# Altium PCB PCB_POTENTIOSTAT_P.PcbDoc
Units mil, origin at the board's own origin, x right, y up, seen from the top; angles counter-clockwise.
Board outline 7826.77 x 4724.41 mil, 2 copper layers (Top Layer, Bottom Layer), stack 61.024 mil thick; 2 components, 116 nets, 0 pads, 0 vias.
Unrouted connection lines stored in the file: 40.
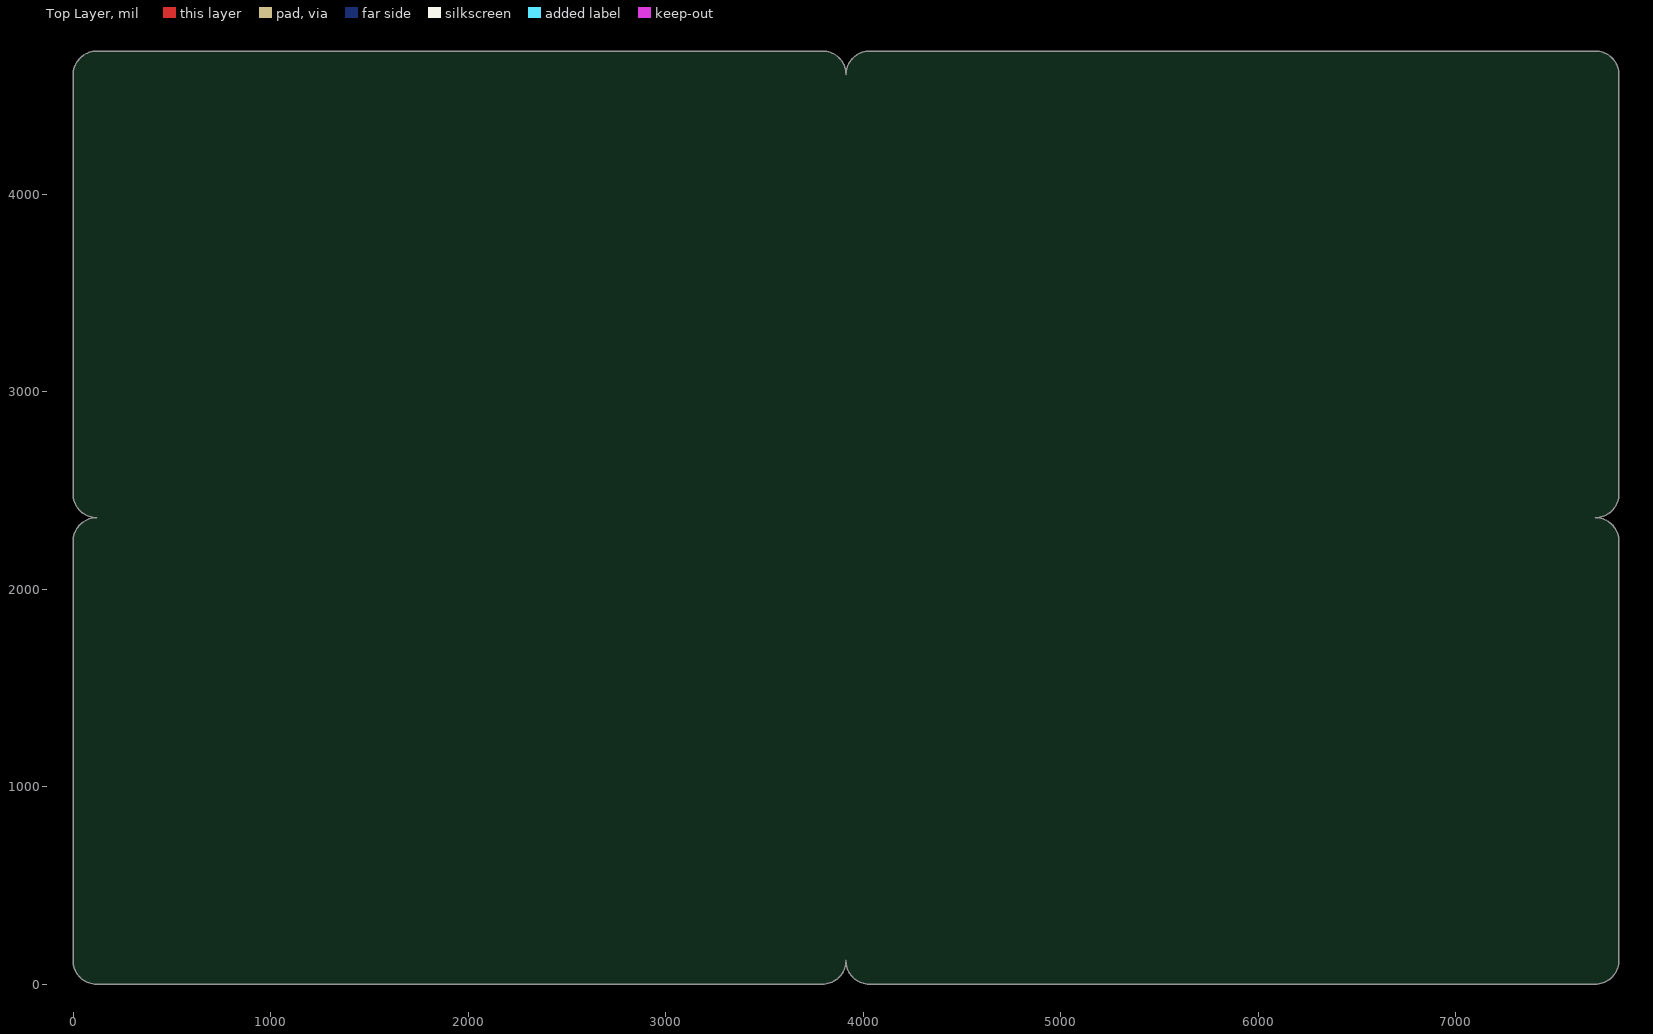
[diagram p0: Top Layer view]
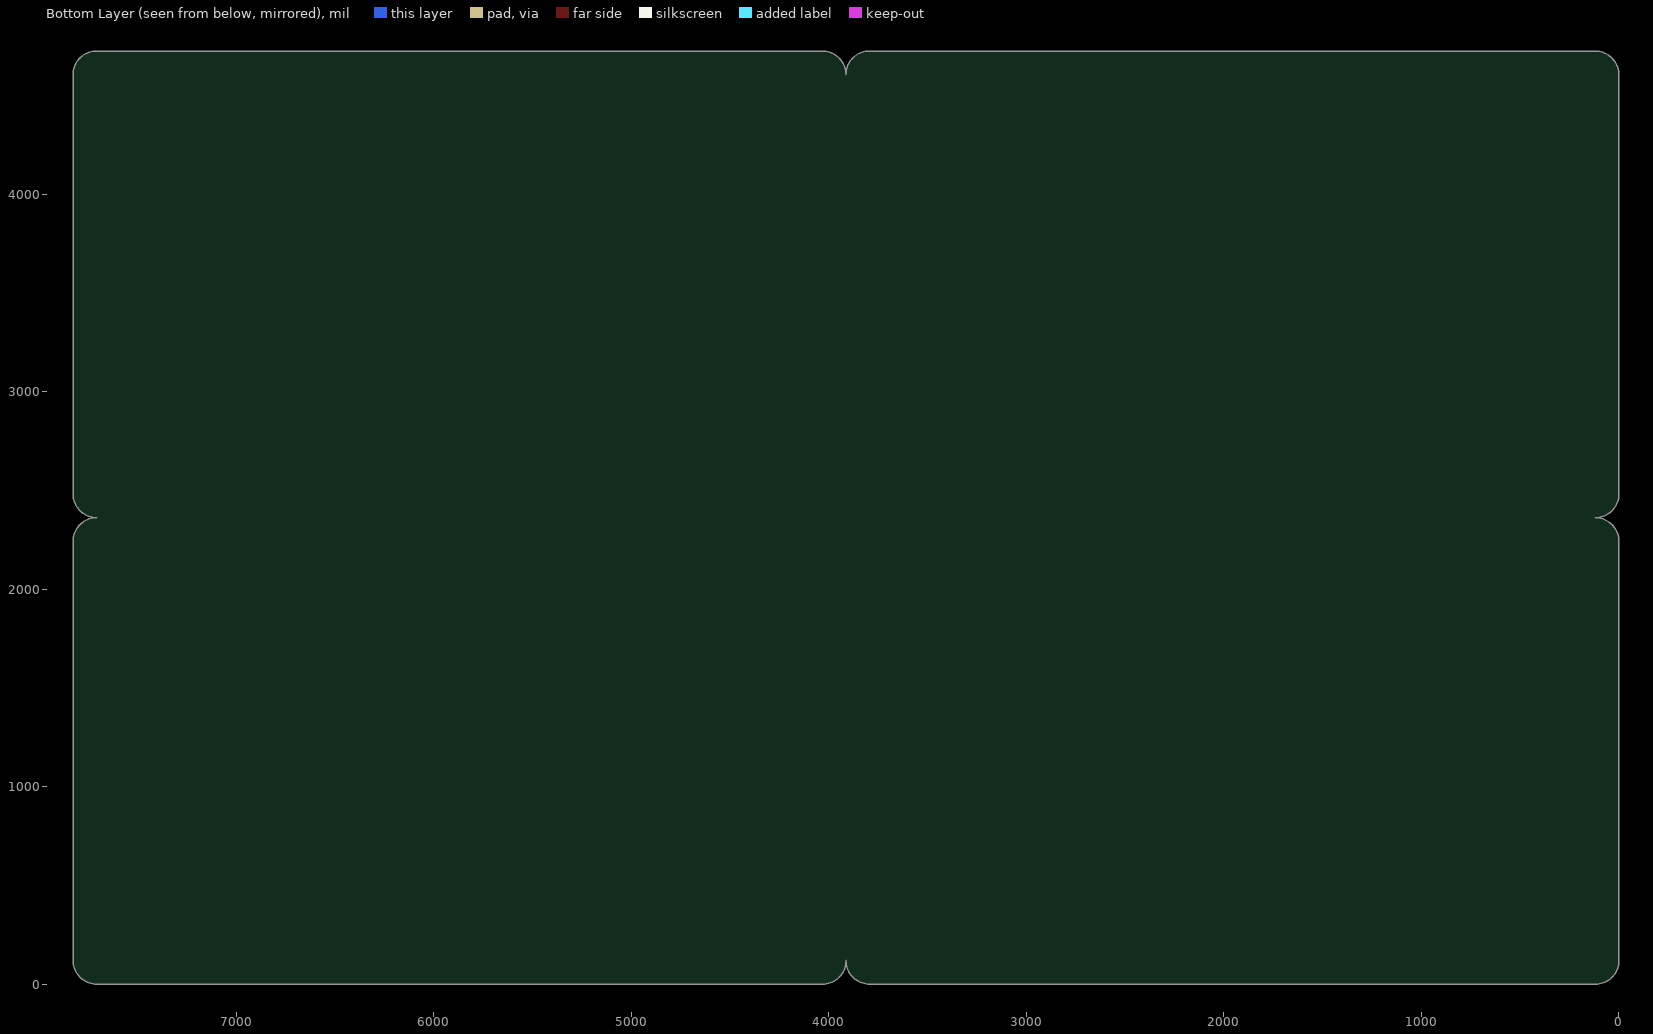
[diagram p1: Bottom Layer view, seen from below]

## Layer stack, top to bottom
Top Solder: solder mask 0.9843, SM-001, Dk 4
Top Layer: signal copper 1.378
Dielectric 3: core 58.2677, Core-039, Dk 4.2
Bottom Layer: signal copper 1.378
Bottom Solder: solder mask 0.9843, SM-001, Dk 4

## Board outline
0,118.11 ccw(c118.11,118.11) 118.11,0 3793.43,0 ccw(c3793.43,119.96) 3913.39,119.96 3913.39,118.11 ccw(c4031.49,118.11) 4031.49,0 7706.82,0 ccw(c7706.82,119.96) 7826.77,119.96 7826.77,2242.89 ccw(c7707.46,2242.89) 7707.46,2362.2 7707.14,2362.2 ccw(c7707.14,2481.84) 7826.77,2481.84 7826.77,4606.3 ccw(c7708.66,4606.3) 7708.66,4724.41 4033.34,4724.41 ccw(c4033.34,4604.45) 3913.39,4604.45 3913.39,4606.3 ccw(c3795.28,4606.3) 3795.28,4724.41 119.96,4724.41 ccw(c119.96,4604.45) 0,4604.45 0,2481.52 ccw(c119.31,2481.52) 119.31,2362.2 119.63,2362.2 ccw(c119.63,2242.57) 0,2242.57

## Design rules (kind name [scope] priority, off if disabled: settings)
Clearance Clearance_FID [HasFootprint('AUX_FIDUCIAL_STN')] p1: gap=35 ignorepadtopadclearanceinfootprint=FALSE except(0: Arc-Hole Track-Hole SMDPad-Hole THPad-Hole Via-Hole Fill-Hole Poly-Hole Region-Hole Text-Hole)
Clearance Clearance_PAR [InNet('USB*') vs InPoly] p2: gap=6 ignorepadtopadclearanceinfootprint=FALSE except(0: Arc-Hole Track-Hole SMDPad-Hole THPad-Hole Via-Hole Fill-Hole Poly-Hole Region-Hole Text-Hole)
Clearance [All] p3: gap=6 ignorepadtopadclearanceinfootprint=FALSE except(0: Arc-Hole Track-Hole SMDPad-Hole THPad-Hole Via-Hole Fill-Hole Poly-Hole Region-Hole Text-Hole; 5.7: Arc-SMDPad Track-SMDPad SMDPad-SMDPad; 8: Arc-Fill Arc-Poly Arc-Region Track-Fill Track-Poly Track-Region SMDPad-Fill SMDPad-Poly SMDPad-Region THPad-Fill THPad-Poly THPad-Region Via-Fill Via-Poly Via-Region; 12: Fill-Fill Fill-Poly Fill-Region Poly-Poly Poly-Region Region-Region)
DiffPairsRouting [All] p1: maxlimit=6 minlimit=6 mostfreqgap=6 toplayer_minwidth=12.3 toplayer_maxwidth=12.3 toplayer_prefwidth=12.3 bottomlayer_minwidth=12.3 bottomlayer_maxwidth=12.3 bottomlayer_prefwidth=12.3 impedanceprofiledriven=TRUE impedanceprofileid={0261A0E6-61D5-4121-8024-2EBF62659778} impedanceprofilevalue=90.000000 maxuncoupledlength=500
HoleSize [All] p1: absolutevalues=TRUE maxlimit=300 minlimit=10 maxpercent=80.000 minpercent=20.000
MinimumAnnularRing [All] p1: minimumring=10
MinimumSolderMaskSliver [All] p1: minsoldermaskwidth=3.5
PlaneClearance [All] p1: clearance=15
PlaneConnect [All] p1: pad.planeconnectstyle=Relief pad.reliefexpansion=20 pad.reliefentries=4 pad.reliefconductorwidth=10 pad.reliefairgap=10 via.planeconnectstyle=Direct via.reliefexpansion=20 via.reliefentries=4 via.reliefconductorwidth=10 via.reliefairgap=10
PolygonConnect [All] p1: thpad.connectstyle=Relief thpad.reliefconductorwidth=30 thpad.reliefentries=4 thpad.polygonreliefangle="90 Angle" thpad.airgapwidth=8 smdpad.connectstyle=Relief smdpad.reliefconductorwidth=16 smdpad.reliefentries=4 smdpad.polygonreliefangle="90 Angle" smdpad.airgapwidth=8 via.connectstyle=Direct via.reliefconductorwidth=10 via.reliefentries=4 via.polygonreliefangle="90 Angle" via.airgapwidth=10
RoutingVias [All] p1: holewidth=11.81 width=24 viastyle="Through Hole" minholewidth=11.81 minwidth=24 maxholewidth=11.81 maxwidth=24
SMDNeckDown [All] p1: percent=100.000
SilkToSilkClearance [All] p1: silktosilkclearance=0
SilkToSolderMaskClearance SilkscreenOverComponentPads [IsPad] p1: minsilkscreentomaskgap=1 clearancetoexposedcopper=TRUE
SolderMaskExpansion SolderMaskExpansion_FID [HasFootprint('AUX_FIDUCIAL_STN')] p1: expansion=30 istentingtop=FALSE
SolderMaskExpansion SolderMaskExpansion_VIA [IsVia] p2: expansion=-20 istentingtop=FALSE
SolderMaskExpansion SolderMaskExpansion_ALL [All] p3: expansion=2 istentingtop=FALSE
Width [All] p1: maxlimit=100 minlimit=6 preferedwidth=6
23 further rules are at their usual default settings.

## Classes and differential pairs
component class Pag1_PowerSupply: IC9
component class Pag3_Front_end_adc_dac: Y?
component class Pag2_Battery_Charger: BT1
differential pair USB_2: +USB_2_P -USB_2_N
differential pair USB_1: +USB_1_P -USB_1_N

## Components (designator, comment, footprint, x,y, rotation, side; value= is the part's Value field where it differs from the comment)
AUX10 "Comment" AUX_RULES1 8197,21 r0 top
AUX20 "Comment" AUX_FID_TEXT 2,5547 r0 top

## Footprints (in the part's own frame and the unit in brackets; to place one, negate y for a bottom-side part, rotate by r counter-clockwise, add the part's x,y. Pads: shape width x height; smd on the part's side, far side on the other; paste and mask are expansions set on the pad)
AUX_FID_TEXT [mil]
AUX_RULES1 [mil]

## Nets (pads, with @x,y where several pads share a name; then routed paths per layer and width w, separated by ;. In a path a pad name is that pad's centre, name@x,y a point inside that pad or via, vN(x,y) a via of type N, cw(c..) or ccw(c..) an arc to the next point about the centre after c; other vN are vias at no path point)
2V5_EN: 
+2_5V: 
+3V3: 
+5VCC: 
AGND: 
CG: 
EXT_GND_DETECT: 
I2C_SCL: 
I2C_SDA: 
LED_RX: 
LED_STATUS1: 
LED_STATUS2: 
LED_TX: 
NetC2_2: 
NetC5_1: 
NetC5_2: 
NetC9_1: 
NetC11_2: 
NetC12_1: 
NetC12_2: 
NetC14_2: 
NetC16_2: 
NetC17_1: 
NetC17_2: 
NetC27_2: 
NetC30_2: 
NetC31_2: 
NetC33_2: 
NetC34_2: 
NetC36_2: 
NetC38_1: 
NetC39_2: 
NetC40_2: 
NetC41_1: 
NetC44_2: 
NetC46_2: 
NetC47_2: 
NetC51_2: 
NetC52_2: 
NetC53_1: 
NetC55_2: 
NetC57_1: 
NetC57_2: 
NetC59_2: 
NetC61_2: 
NetC62_2: 
NetC65_2: 
NetC75_2: 
NetC76_2: 
NetCN1_2: 
NetCN2_4: 
NetCN3_1: 
NetCN3_2: 
NetCN3_3: 
NetCON5_2: 
NetCON5_4: 
NetCON5_6: 
NetCON5_8: 
NetCON5_10: 
NetD1_2: 
NetD2_A: 
NetIC1_4: 
NetIC3_2: 
NetIC3_5: 
NetIC3_6: 
NetIC3_7: 
NetIC3_8: 
NetIC4_17: 
NetIC4_18: 
NetIC4_19: 
NetIC4_21: 
NetIC4_23: 
NetIC4_30: 
NetIC4_31: 
NetIC4_32: 
NetIC5_1: 
NetIC5_2: 
NetIC5_3: 
NetIC5_4: 
NetIC5_8: 
NetIC5_12: 
NetIC5_13: 
NetIC8_11: 
NetIC8_24: 
NetIC8_26: 
NetIC8_34: 
NetIC8_35: 
NetLED1_1: 
NetLED1_2: 
NetLED2_1: 
NetLED2_2: 
NetLED3_2: 
NetLED4_2: 
NetLED5_2: 
NetLED6_2: 
NetR2_1: 
NetR16_2: 
NetR17_1: 
NetR24_2: 
NetR26_2: 
NetR27_2: 
NetR28_2: 
NetR32_2: 
NetR54_1: 
NetR60_1: 
NRST: 
REGN: 
TS1: 
USB_1_N: 
USB_1_P: 
USB_2_N: 
USB_2_P: 
V_Bat: 
V_BUS: 
V_EN: 
VBUS_USB1: 

## Other copper
Top Layer:
  text ".Layer_Name" at 644.43,-1000.38 h60
Bottom Layer:
  text ".Layer_Name" at 644.43,-1000.38 h60

## Silkscreen, mask and mechanical layers (free items; w line width, h text height)
Top Overlay:
  text ".Layer_Name" at 689.43,-1001.38 h60
Bottom Overlay:
  text ".Layer_Name" at 591.43,-995.38 h60
Top Paste:
  text ".Layer_Name" at 707.43,-998.38 h60
Bottom Paste:
  text ".Layer_Name" at 690.43,-1001.38 h60
Top Solder:
  text ".Layer_Name" at 689.43,-1001.38 h60
Bottom Solder:
  text "Bottom Solder" at 614.43,-999.38 h60
Fab Notes:
  lines w10: 14457,8116 14457,11316 17952,11316 17952,8116 14457,8116
  lines w15: 14448.66,1040.33 14923.55,1040.33 16004.92,1040.33 16701.42,1040.33 17456.23,1040.33 18117.73,1040.33 18662.61,1040.33 ; 14448.66,1180.33 14923.55,1180.33 16004.92,1180.33 16701.42,1180.33 17456.23,1180.33 18117.73,1180.33 18662.61,1180.33 ; 14448.66,1320.33 14923.55,1320.33 16004.92,1320.33 16701.42,1320.33 17456.23,1320.33 18117.73,1320.33 18662.61,1320.33 ; 14448.66,1460.33 14923.55,1460.33 16004.92,1460.33 16701.42,1460.33 17456.23,1460.33 18117.73,1460.33 18662.61,1460.33 ; 14448.66,1600.33 14923.55,1600.33 16004.92,1600.33 16701.42,1600.33 17456.23,1600.33 18117.73,1600.33 18662.61,1600.33 ; 14448.66,1740.33 14923.55,1740.33 16004.92,1740.33 16701.42,1740.33 17456.23,1740.33 18117.73,1740.33 18662.61,1740.33 ; 14448.66,1880.33 18662.61,1880.33 ; 14923.55,2020.33 14923.55,900.33 ; 16004.92,2020.33 16004.92,900.33 ; 16701.42,2020.33 16701.42,900.33 ; 17456.23,2020.33 17456.23,900.33 ; 18117.73,2020.33 18117.73,900.33 ; 14923.55,900.33 16004.92,900.33 ; 14923.55,900.33 14448.66,900.33 14448.66,2020.33 18662.61,2020.33 18662.61,900.33 18117.73,900.33 ; 16004.92,900.33 16701.42,900.33 ; 16701.42,900.33 17456.23,900.33 ; 17456.23,900.33 18117.73,900.33
  text "Manufacturing Especification" at 14999,11491 h200
  text "- BOARD SUBSTRATE MATERIAL: FR4-UL94V-0" at 14577,11116 h80
  text "- SURFACE FINISHING:" at 14577,10956 h80
  text "(x) GOLD IMMERSION (ENIG)" at 14577,10796 h80
  text "( ) HOT AIR LEVELING" at 14577,10636 h80
  text "( ) LEAD-FREE HOT AIR LEVELING" at 14577,10476 h80
  text "( ) EDGE CONNECTOR PLATING" at 14577,10316 h80
  text "- SOLDER MASK COLOR: GREEN" at 14577,9996 h80
  text "- TOP SILK-SCREEN COLOR: WHITE" at 14577,9836 h80
  text "- BOTTOM SILK-SCREEN COLOR: WHITE" at 14577,9676 h80
  text "- NO GERBER MODIFICATIONS ARE ALLOWED" at 14577,9356 h80
  text "WITHOUT PREVIOUS AUTHORIZATION." at 14577,9196 h80
  text "- TEAR-DROPS CAN BE ADDED TO IMPROVE" at 14577,9036 h80
  text "MANUFACTURABILTY." at 14577,8876 h80
  text "- SEE LAYER STACK-UP TABLE FOR MORE" at 14577,8716 h80
  text "DETAILED STACKING INFORMATION." at 14577,8556 h80
  text "- USE IPC-CLASS 2 AS STANDARD FOR" at 14577,8396 h80
  text "MANUFACTURING." at 14577,8236 h80
  text "Layer Stack Up Detail" at 15865,2085 h200
  text "Layer" at 14528.66,1915.33 h70
  text "Name" at 15003.55,1915.33 h70
  text "Material" at 16084.92,1915.33 h70
  text "Thickness" at 16781.42,1915.33 h70
  text "Constant" at 17536.23,1915.33 h70
  text "Gerber" at 18197.73,1915.33 h70
  text "Top Overlay" at 15003.55,1775.33 h70
  text "GTO" at 18197.73,1775.33 h70
  text "Top Solder" at 15003.55,1635.33 h70
  text "SM-001" at 16084.92,1635.33 h70
  text "0,025mm" at 16781.42,1635.33 h70
  text "4" at 17536.23,1635.33 h70
  text "GTS" at 18197.73,1635.33 h70
  text "1" at 14528.66,1495.33 h70
  text "Top Layer" at 15003.55,1495.33 h70
  text "Copper" at 16084.92,1495.33 h70
  text "0,035mm" at 16781.42,1495.33 h70
  text "GTL" at 18197.73,1495.33 h70
  text "Dielectric 3" at 15003.55,1355.33 h70
  text "Core-039" at 16084.92,1355.33 h70
  text "1,480mm" at 16781.42,1355.33 h70
  text "4,2" at 17536.23,1355.33 h70
  text "2" at 14528.66,1215.33 h70
  text "Bottom Layer" at 15003.55,1215.33 h70
  text "Copper" at 16084.92,1215.33 h70
  text "0,035mm" at 16781.42,1215.33 h70
  text "GBL" at 18197.73,1215.33 h70
  text "Bottom Solder" at 15003.55,1075.33 h70
  text "SM-001" at 16084.92,1075.33 h70
  text "0,025mm" at 16781.42,1075.33 h70
  text "4" at 17536.23,1075.33 h70
  text "GBS" at 18197.73,1075.33 h70
  text "Bottom Overlay" at 15003.55,935.33 h70
  text "GBO" at 18197.73,935.33 h70
  text "Total board thickness:" at 14528.66,795.33 h70
  text "1,600mm" at 16781.42,795.33 h70
  text "1) All differential pairs at their respective layers, with trace width specified (12.3/6/12.3 mil), must be adjusted" at 14404.49,449.42 h80
  text "in order to obtain Zdiff = 90 +/- 10%. For TOP and BOTTOM pairs a Differential Edge-Coupled Microstrip" at 14404.49,249.42 h80
  text "configuration is used, for internal layer pairs a Differential Edge-Coupled Stripline configuration is used." at 14404.49,49.42 h80
  text "Manufacturing Especification" at 158.49,-991.58 h60
V Cut:
  lines w20: 1.21,2362.2 119.31,2362.2 ; 119.63,2362.2 7707.14,2362.2 7825.25,2362.2 ; 3913.39,1.85 3913.39,119.96 ; 3913.39,118.11 3913.39,4606.3 3913.39,4724.41
  text "VCUT" at 3800,4765 h60
  text "VCUT" at 7847,2329 h60
Route Tool Path:
  lines w20: 3793.75,2362.2 ccw(c3793.75,2481.84) 3913.39,2481.84 ; 3794.07,2362.2 cw(c3794.07,2242.89) 3913.39,2242.89 ; 3913.39,2242.57 cw(c4033.02,2242.57) 4033.02,2362.2 ; 3913.39,2481.52 ccw(c4032.7,2481.52) 4032.7,2362.2
  text "CUTOUT" at 3868,2355 h16
  text ".Layer_Name" at 643.43,-1000.38 h60
AUXILIAR:
  lines w15: 0,0 0,118.11 ; 7826.77,4606.3 7826.77,4724.41
Drill Drawing:
  circle w10: c109.25,6949.35 r20
  circle w10: c109.25,6949.35 r33.33
  circle w10: c109.25,5899.35 r33.33
  lines w10: 75.92,5749.35 109.25,5716.01 142.58,5749.35 109.25,5782.68 75.92,5749.35 ; 75.92,6032.68 92.58,6032.68 109.25,6016.01 125.92,6032.68 142.58,6032.68 125.92,6049.35 142.58,6066.01 125.92,6066.01 109.25,6082.68 92.58,6066.01 75.92,6066.01 92.58,6049.35 75.92,6032.68 ; 75.92,6182.68 92.58,6182.68 92.58,6166.01 125.92,6166.01 125.92,6182.68 142.58,6182.68 142.58,6216.01 125.92,6216.01 125.92,6232.68 92.58,6232.68 92.58,6216.01 75.92,6216.01 75.92,6182.68 ; 75.92,6316.01 142.58,6316.01 142.58,6382.68 75.92,6382.68 75.92,6316.01 ; 75.92,6466.01 75.92,6482.68 92.58,6499.35 75.92,6516.01 75.92,6532.68 92.58,6532.68 109.25,6516.01 125.92,6532.68 142.58,6532.68 142.58,6516.01 125.92,6499.35 142.58,6482.68 142.58,6466.01 125.92,6466.01 109.25,6482.68 92.58,6466.01 75.92,6466.01 ; 75.92,6682.68 142.58,6682.68 109.25,6616.01 75.92,6682.68 ; 75.92,6766.01 109.25,6782.68 142.58,6766.01 125.92,6799.35 142.58,6832.68 109.25,6816.01 75.92,6832.68 92.58,6799.35 75.92,6766.01 ; 75.92,7066.01 142.58,7066.01 142.58,7132.68 75.92,7132.68 75.92,7066.01 ; 89.25,7079.35 129.25,7079.35 129.25,7119.35 89.25,7119.35 89.25,7079.35
  lines w15: 16.12,5671.01 7490.04,5671.01 ; 16.12,7171.01 7490.04,7171.01 ; 567,5521.01 567,7321.01 ; 1216.83,5521.01 1216.83,7321.01 ; 2266.52,5521.01 2266.52,7321.01 ; 3624.12,5521.01 3624.12,7321.01 ; 4130,5521.01 4130,7321.01 ; 4863.8,5521.01 4863.8,7321.01 ; 6363.35,5521.01 6363.35,7321.01 ; 16.12,5521.01 7490.04,5521.01 7490.04,7321.01 16.12,7321.01 16.12,5521.01
  text "Symbol" at 106.12,7216.01 h72
  text "Count" at 612,7216.01 h72
  text "Hole Size" at 1261.83,7216.01 h72
  text "Routed Path Length" at 2311.52,7216.01 h72
  text "Plated" at 3669.12,7216.01 h72
  text "Hole Type" at 4175,7216.01 h72
  text "Drill Layer Pair" at 4908.8,7216.01 h72
  text "Hole Tolerance" at 6408.35,7216.01 h72
  text "2020" at 612,7066.01 h60
  text "0,3mm (11,81mil)" at 1261.83,7066.01 h60
  text "-" at 2311.52,7066.01 h60
  text "PTH" at 3669.12,7066.01 h60
  text "Round" at 4175,7066.01 h60
  text "Top Layer - Bottom Layer" at 4908.8,7066.01 h60
  text "+/-0,1mm" at 6408.35,7066.01 h60
  text "16" at 612,6916.01 h60
  text "0,4mm (15,75mil)" at 1261.83,6916.01 h60
  text "-" at 2311.52,6916.01 h60
  text "PTH" at 3669.12,6916.01 h60
  text "Round" at 4175,6916.01 h60
  text "Top Layer - Bottom Layer" at 4908.8,6916.01 h60
  text "+/-0,1mm" at 6408.35,6916.01 h60
  text "20" at 612,6766.01 h60
  text "0,7mm (27,56mil)" at 1261.83,6766.01 h60
  text "-" at 2311.52,6766.01 h60
  text "PTH" at 3669.12,6766.01 h60
  text "Round" at 4175,6766.01 h60
  text "Top Layer - Bottom Layer" at 4908.8,6766.01 h60
  text "+/-0,1mm" at 6408.35,6766.01 h60
  text "24" at 612,6616.01 h60
  text "0,9mm (35,43mil)" at 1261.83,6616.01 h60
  text "-" at 2311.52,6616.01 h60
  text "PTH" at 3669.12,6616.01 h60
  text "Round" at 4175,6616.01 h60
  text "Top Layer - Bottom Layer" at 4908.8,6616.01 h60
  text "+/-0,1mm" at 6408.35,6616.01 h60
  text "8" at 612,6466.01 h60
  text "1,0mm (39,37mil)" at 1261.83,6466.01 h60
  text "-" at 2311.52,6466.01 h60
  text "PTH" at 3669.12,6466.01 h60
  text "Round" at 4175,6466.01 h60
  text "Top Layer - Bottom Layer" at 4908.8,6466.01 h60
  text "+/-0,1mm" at 6408.35,6466.01 h60
  text "48" at 612,6316.01 h60
  text "1,3mm (51,18mil)" at 1261.83,6316.01 h60
  text "-" at 2311.52,6316.01 h60
  text "PTH" at 3669.12,6316.01 h60
  text "Round" at 4175,6316.01 h60
  text "Top Layer - Bottom Layer" at 4908.8,6316.01 h60
  text "+/-0,1mm" at 6408.35,6316.01 h60
  text "8" at 612,6166.01 h60
  text "1,4mm (55,12mil)" at 1261.83,6166.01 h60
  text "-" at 2311.52,6166.01 h60
  text "PTH" at 3669.12,6166.01 h60
  text "Round" at 4175,6166.01 h60
  text "Top Layer - Bottom Layer" at 4908.8,6166.01 h60
  text "+/-0,1mm" at 6408.35,6166.01 h60
  text "8" at 612,6016.01 h60
  text "1,9mm (74,80mil)" at 1261.83,6016.01 h60
  text "-1,2mm (-47,24mil)" at 2311.52,6016.01 h60
  text "PTH" at 3669.12,6016.01 h60
  text "Slot" at 4175,6016.01 h60
  text "Top Layer - Bottom Layer" at 4908.8,6016.01 h60
  text "+/-0,1mm" at 6408.35,6016.01 h60
  text "12" at 612,5866.01 h60
  text "2,2mm (86,61mil)" at 1261.83,5866.01 h60
  text "-" at 2311.52,5866.01 h60
  text "PTH" at 3669.12,5866.01 h60
  text "Round" at 4175,5866.01 h60
  text "Top Layer - Bottom Layer" at 4908.8,5866.01 h60
  text "+/-0,1mm" at 6408.35,5866.01 h60
  text "16" at 612,5716.01 h60
  text "3,3mm (129,92mil)" at 1261.83,5716.01 h60
  text "-" at 2311.52,5716.01 h60
  text "PTH" at 3669.12,5716.01 h60
  text "Round" at 4175,5716.01 h60
  text "Top Layer - Bottom Layer" at 4908.8,5716.01 h60
  text "+/-0,1mm" at 6408.35,5716.01 h60
  text "2180 Total" at 612,5566.01 h60
  text "Slot definitions :" at 106.12,5421.04 h60
  text "Routed Path Length" at 1138.81,5421.04 h60
  text "= Calculated from tool start centre position to tool end centre position." at 2241.48,5421.04 h60
  text "Hole Length" at 1138.81,5321.06 h60
  text "= Routed Path Length + Tool Size = Slot length as defined in the PCB layout" at 1831.61,5321.06 h60
  text ".Layer_Name" at 643.43,-996.38 h60
Board:
  lines w8: 25.93,-586.85 1881.93,-586.85 ; 25.93,-425.96 1881.93,-425.96 ; 360.93,-770.96 360.93,-265.96 ; 1881.93,-1111.96 1881.93,-771.96 1881.93,-266.96 ; 1884.93,-882.85 3749.93,-882.85 ; 1884.93,-710.85 3749.93,-709.96 ; 2718.93,-1109.96 2718.93,-882.85 ; 3137.51,-993.85 3749.51,-993.85 ; 3137.93,-1110.96 3137.93,-882.85
  lines w10: 1881.93,-770.96 24.93,-770.96 ; 24.93,-770.96 24.93,-266.96 354.93,-266.96 3749.93,-266.96 3749.93,-1111.96 24.93,-1110.96 24.93,-770.96
  lines w20: 118.53,4724.41 3795.28,4724.41 cw(c3795.28,4606.3) 3913.39,4606.3 ; 119.31,2362.2 cw(c119.31,2481.52) 0,2481.52 0,4604.45 cw(c119.96,4604.45) 119.96,4724.41 ; 119.63,2362.2 ccw(c119.63,2242.57) 0,2242.57 0,118.11 ccw(c118.11,118.11) 118.11,0 3793.43,0 ccw(c3793.43,119.96) 3913.39,119.96 ; 3913.39,118.11 ccw(c4031.49,118.11) 4031.49,0 7708.24,0 ; 3913.39,4604.45 cw(c4033.34,4604.45) 4033.34,4724.41 7708.66,4724.41 cw(c7708.66,4606.3) 7826.77,4606.3 7826.77,2481.84 cw(c7707.14,2481.84) 7707.14,2362.2 ; 7706.82,0 ccw(c7706.82,119.96) 7826.77,119.96 7826.77,2242.89 ccw(c7707.46,2242.89) 7707.46,2362.2
  text "PROJ." at 57.93,-391.96 h70
  text "Gleiton Garcia" at 404.01,-392.05 h60
  text "DESIG." at 57.93,-545.96 h70
  text "PCB Solution" at 404.01,-547.05 h60
  text "PULLUP" at 2297.49,-595.58 h200
  text "REV." at 57.93,-718.96 h70
  text "Sergio Forcellini" at 406.01,-724.05 h60
  text "Placa:" at 1913.01,-824.05 h70
  text "POTENCIOSTATO V1.2" at 2241.01,-828.05 h60
  text "Revisao:" at 2765.51,-961.85 h60
  text "Escala:" at 3175.51,-964.85 h60
  text "Data:" at 2155.51,-970.85 h60
  text "16/08/2022" at 2027,-1071 h60
  text "Rev: 1.2" at 2776.63,-1076.97 h60
  text "Folha:" at 3176.93,-1077.96 h60

## Dimensions
0,4604.45 to 7826.77,4606.3 on Fab Notes
0,4604.45 to 3913.39,4606.3 on Fab Notes
0,0 to 118.53,4724.41 on Fab Notes
0,0 to 119.63,2362.2 on Fab Notes

## Panel: embedded boards
"PCB_POTENTIOSTAT.PcbDoc" at 7826.77,4724.41, 1 rows x 2 columns, spacing 2362.2 x 3913.39, rotation 180
"PCB_POTENTIOSTAT.PcbDoc" at 0,0, 1 rows x 2 columns, spacing 2362.2 x 3913.39, rotation 0

## Text inside footprints (layer, text, board x,y; h text height)
AUX10: Fab Notes "BOARD MATERIAL" at 10612,6096 h80; Fab Notes "BOARD SUBSTRATE MATERIAL: (X) FR4-UL94V-0" at 8317,5776 h80; Fab Notes "SOLDER MASK COLOR: (X) GREEN ( ) BLACK ( ) RED ( )BLUE" at 8317,8016 h80; Fab Notes "-" at 14997,3216 h80; Fab Notes "MAXIMUM" at 14937,5456 h80; Fab Notes "IMMERSION TIN PLATING" at 8317,4816 h80; Fab Notes "HOT AIR LEVELING ( HAL )" at 8317,5136 h80; Fab Notes "NOTES" at 10867,1021 h80; Fab Notes "PACKAGE REQUIREMENTS" at 10367,2896 h80; Fab Notes "1 mil ( 0.025 mm )" at 12317,3216 h80; Fab Notes "IMMERSION GOLD" at 10317,3536 h80; Fab Notes "0.02 mil ( 0.4 um )" at 12317,3536 h80; Fab Notes "ELECTROLESS NICKEL" at 10317,3856 h80; Fab Notes "0.2 mil ( 0.005 mm )" at 12317,3856 h80; Fab Notes "IMMERSION GOLD" at 10317,4176 h80; Fab Notes "0.002 mil ( 0.05 um )" at 12317,4176 h80; Fab Notes "ELECTROLESS NICKEL" at 10317,4496 h80; Fab Notes "0.12 mil ( 0.003 mm )" at 12317,4496 h80; Fab Notes "According to IPC-4554" at 13347,4816 h80; Fab Notes "0.2 mil ( 0.005 mm )" at 12317,5136 h80; Fab Notes "MINIMUM" at 12942,5456 h80; Fab Notes "18 mil ( 0.46 mm )" at 12317,8336 h80; Fab Notes "EDGE CONNECTOR PLATING" at 8317,3696 h80; Fab Notes "IMMERSION GOLD (ENIG)" at 8317,4336 h80; Fab Notes "USE IPC6010-CLASS 2 AS STANDARD FOR MANUFACTURING." at 8312,81 h80; Fab Notes "SEE LAYER STACK-UP TABLE FOR MORE DETAILED STACKING INFORMATION." at 8312,301 h80; Fab Notes "TEAR-DROPS CAN BE ADDED TO IMPROVE MANUFACTURABILTY." at 8312,521 h80; Fab Notes "Inspection reports and all other test results must be sent in PDF format." at 8317,1291 h74; Fab Notes "Shipments must not contain boards with date code previous to the PO." at 8317,1511 h74; Fab Notes "Maximum of 20 PCBs or Panels per package." at 8317,1941 h74; Fab Notes "Manufacturer labels must not obstruct company number and date codes." at 8317,2161 h74; Fab Notes "All packages must be vacuum sealed and contain silica gel or a similar desiccant." at 8317,2626 h74; Fab Notes "COPPER THICKNESS IN PLATED HOLES" at 8317,3216 h80; Fab Notes "0.04 mil ( 0.001 mm )" at 14317,3536 h80; Fab Notes "0.4 mil ( 0.010 mm )" at 14317,3856 h80; Fab Notes "0.008 mil ( 0.2 um )" at 14317,4176 h80; Fab Notes "0.24 mil ( 0.006 mm )" at 14317,4496 h80; Fab Notes "0.6 mil ( 0.015 mm )" at 14317,5136 h80; Fab Notes "SURFACE FINISHING THICKNESS" at 9157,5456 h80; Fab Notes "VIA HOLES WITHOUT SOLDERMASK OPENING SHOULD BE PLUGGED WITH SOLDERMASK" at 8317,7696 h80; Fab Notes "MAXIMUM PITCH WITHOUT SOLDERMASK BETWEEN PADS" at 8317,8336 h80; Fab Notes "NO GERBER MODIFICATIONS ARE ALLOWED WITHOUT PREVIOUS AUTHORIZATION." at 8312,731 h80; Fab Notes "Total shipped quantity must be equal to PO, with tolerance of 10% above it." at 8317,1731 h74; Fab Notes "The package must be resistant to maintain vacuum during transport." at 8317,2381 h74; Fab Notes "IPC-SM-840" at 12317,8656 h80; Fab Notes "LAYER TO LAYER REGISTRATION" at 8317,9616 h80; Fab Notes "+/- 5 mil ( 0.12 mm )" at 12317,9616 h80; Fab Notes "1" at 12317,9936 h80; Fab Notes "MAXIMUM ALLOWED NUMBER OF REWORKS PER SIDE" at 8317,9936 h80; Fab Notes "MECHANICAL" at 10817,11536 h80; Fab Notes "RIGHT ANGLE ROUTING RADIUS ( maximum )" at 8317,11216 h80; Fab Notes "BORDER DIMENSIONAL TOLERANCE" at 8317,10896 h80; Fab Notes "BOARD TWIST (of the largest dimension)" at 8317,10576 h80; Fab Notes "BOARD CURVATURE (of the largest dimension)" at 8317,10256 h80; Fab Notes "40 mils ( 1 mm )" at 12317,11216 h80; Fab Notes "+/- 8 mils ( 0.2 mm )" at 12317,10896 h80; Fab Notes "+/- 0.75%" at 12317,10576 h80; Fab Notes "+/- 0.75%" at 12317,10256 h80; Fab Notes "+/- 3 mil ( 0.076 mm )" at 12317,8976 h80; Fab Notes "SOLDERMASK THICKNESS" at 8317,8656 h80; Fab Notes "SOLDERMASK POSITION TOLERANCE" at 8317,8976 h80; Fab Notes "SOLDERMASK" at 10812,9296 h80; Fab Notes "SILKSCREEN PCB PER PROVIDED DATA USING PERMANENT, NON-CONDUCTIVE INK." at 8312,7056 h80; Fab Notes "TOP SILK-SCREEN COLOR: (X) WHITE ( ) YELLOW ( ) BLACK" at 8312,6756 h80; Fab Notes "BOTTOM SILK-SCREEN COLOR: (X) WHITE ( ) YELLOW ( ) BLACK" at 8312,6416 h80; Fab Notes "SILKSCREEN" at 10747,7376 h80
AUX20: STN TOP "- A SETA INDICA A DIRECAO DE" at 602,5852 h100; STN TOP "PASSAGEM NA LINHA." at 802,5652 h100; STN TOP "NO LADO INFERIOR DO STENCIL E" at 802,6252 h100; STN TOP "- ESTES FIDUCIAIS DEVEM ESTAR" at 602,6447 h100; STN TOP "NAO DEVEM SER FURADOS." at 802,6047 h100